# Altium PCB Main.PcbDoc (part 2 of 2)
Units mil, origin at the board's own origin, x right, y up, seen from the top; angles counter-clockwise.
Board outline 3887.19 x 3937.01 mil, 4 copper layers (Top Layer, GND, 3V3, Bottom Layer), stack 62.296 mil thick; 123 components, 108 nets, 442 pads, 608 vias.
Unrouted connection lines stored in the file: 51.
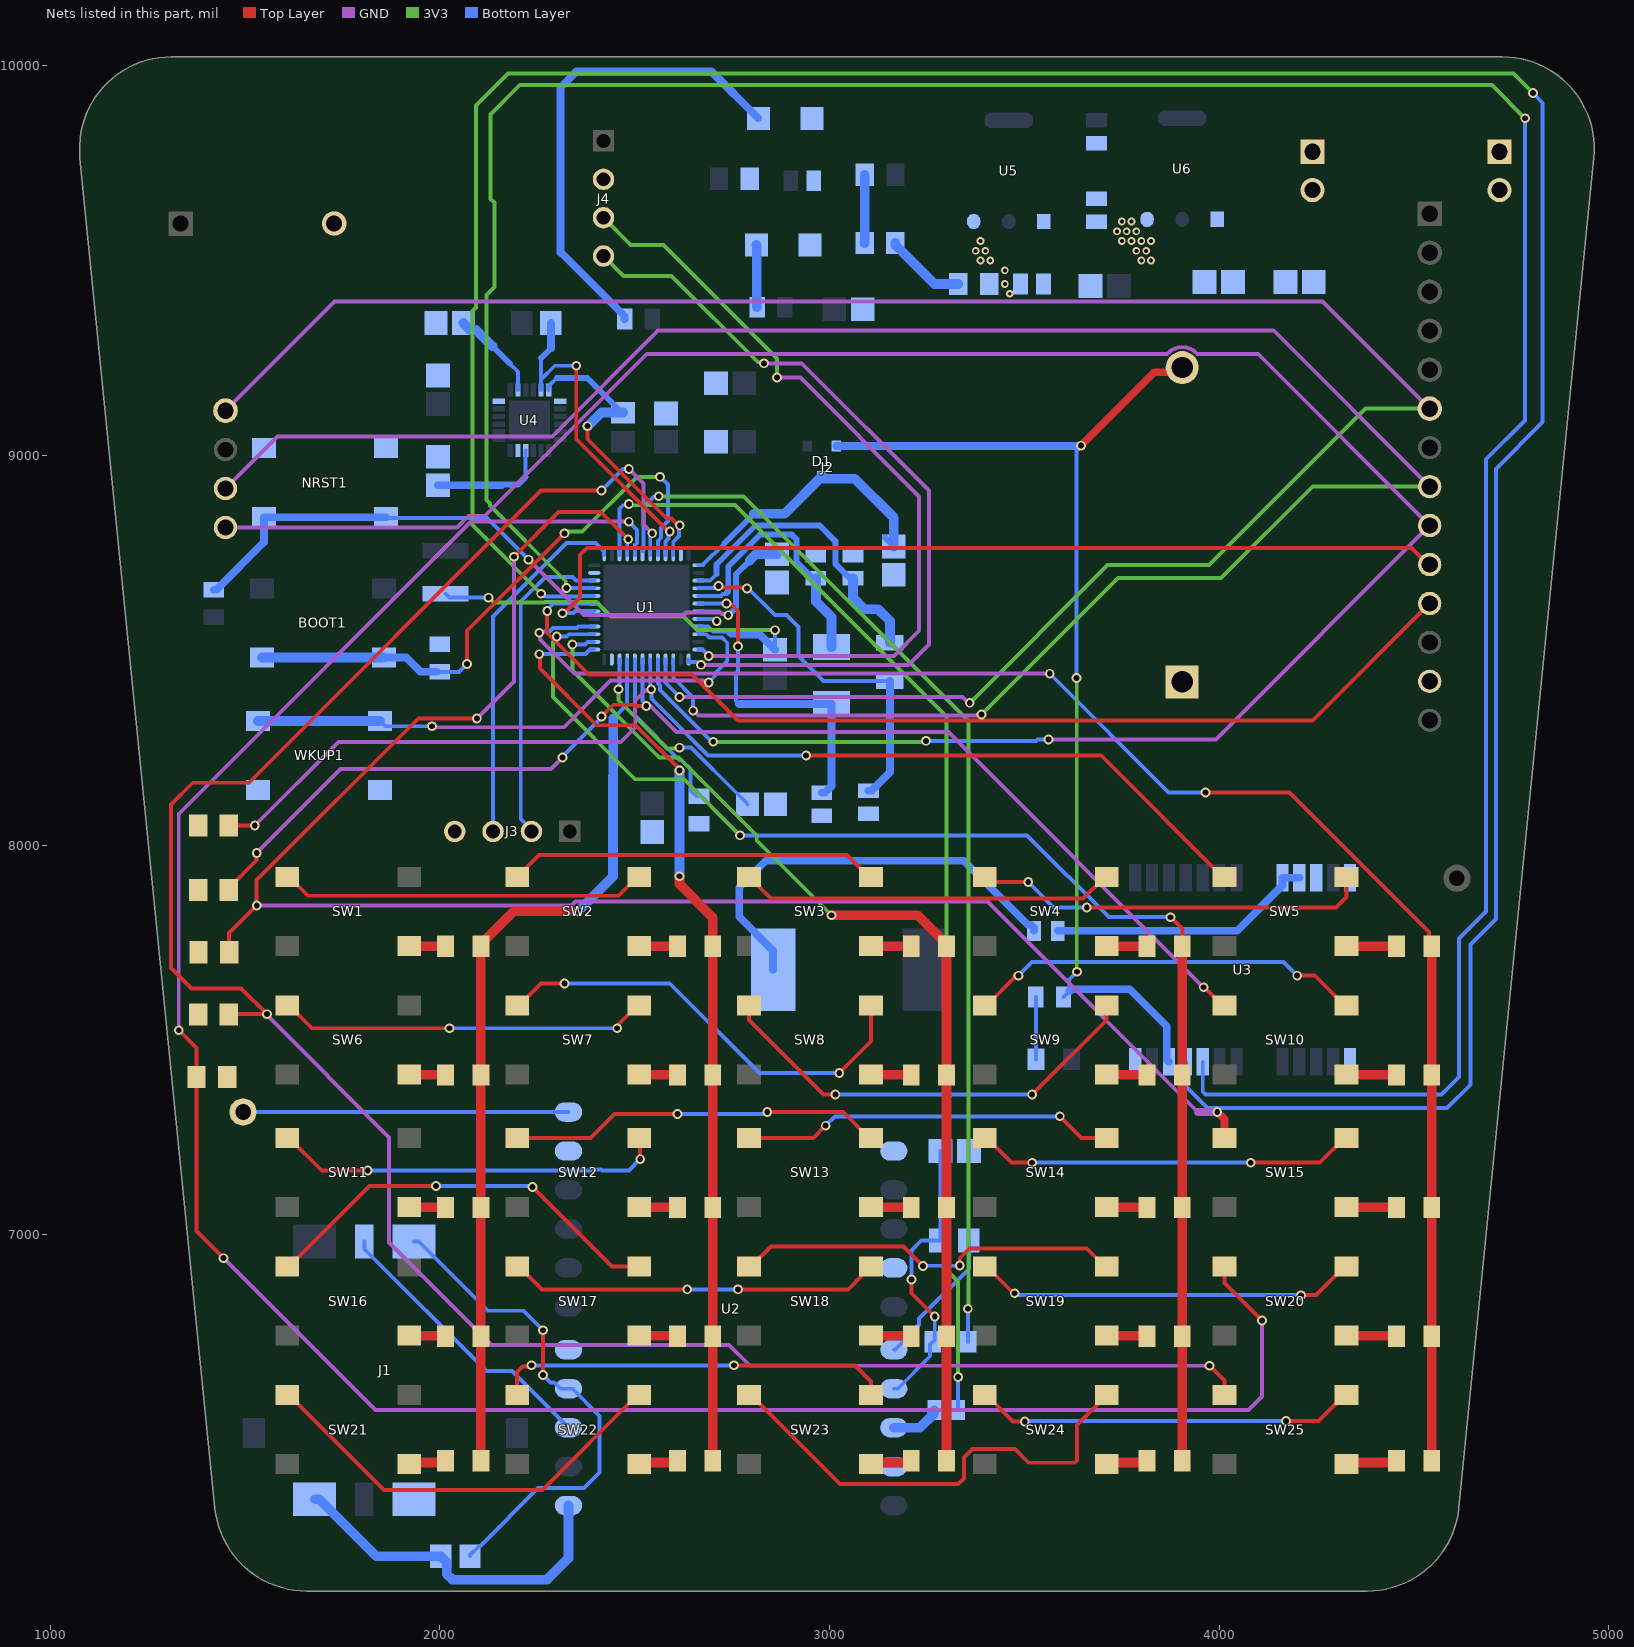
[diagram p4: the nets of this part, all layers, seen from the top]

## Via types
v1: diameter 19.68, hole 10.1, Top Layer to 3V3, 228 vias
v2: diameter 19.68, hole 10.1, 3V3 to Bottom Layer, 190 vias
v3: diameter 25, hole 15, Top Layer to Bottom Layer, 63 vias
v4: diameter 25, hole 15, GND to Bottom Layer, 29 vias
v5: diameter 19.68, hole 7.87, Top Layer to Bottom Layer, 29 vias
v6: diameter 25, hole 15, Top Layer to GND, 22 vias
v7: diameter 19.68, hole 10.1, Top Layer to Bottom Layer, 21 vias
v8: diameter 25, hole 15, 3V3 to Bottom Layer, 20 vias
v9: diameter 25, hole 15, GND to 3V3, 4 vias
v10: diameter 25, hole 15, Top Layer to 3V3, 2 vias

## Nets (pads, with @x,y where several pads share a name; then routed paths per layer and width w, separated by ;. In a path a pad name is that pad's centre, name@x,y a point inside that pad or via, vN(x,y) a via of type N, cw(c..) or ccw(c..) an arc to the next point about the centre after c; other vN are vias at no path point) (continued)
D/C: J2.11 U1.31 | length 2670.6
  Top Layer w10: v3(2275.6,8600.9) 2275,8600.29 2275,8545 2382.21,8437.79 2647.21,8437.79 2765,8320 4240,8320 J2.11@4540,8620
  Bottom Layer w10: v3(2275.6,8600.9) 2275.6,8604.95 2288.36,8617.71 2288.36,8619.84 U1.31@2396.14,8619.84
GND: BT1.1 C1.1 C2.2 C3.1 C4.1 C5.1 C6.1 C7.2 C8.2 C9.2 C10.2 C12.1 C13.1 C14.1 C15.1 C16.1 C17.1 C18.1 C19.2 C20.2 C21.1 C22.1 C23.2 C24.2 DS1.2 DS2.2 J1.C3 J2.13 J3.4 J4.2 LS1.2 NRST1.1 NRST1.2 P2.2 P4.2 R1.1 R2.1 R10.1 R11.1 R12.1 R13.1 R14.1 R19.1 U1.8 U1.23 U1.35 U1.47 U2.1 U2.4 U2.9 U2.15 U2.20 U3.10 U3.12 U3.13 U3.24 U4.1 U4.11 U4.18 U5.1 U6.1 WKUP1.3 WKUP1.4 | length 49.2
  Bottom Layer w10: U1.8@2663.86,8580.47 2700.76,8580.47 2706.58,8574.65 v4(2710.64,8574.65)
GPRS_RX: R4.1 U1.39 | length 2981.5
  3V3 w10: v3(2485,8875) 2487.87,8872.13 2511.85,8872.13 2512.22,8872.5 2757.5,8872.5 3300.28,8329.72 3300.28,6909.37 3330,6879.64 v3(3330,6635)
  Bottom Layer w10: U1.39@2461.1,8743.86 2461.1,8863.01 2470.23,8872.13 2482.13,8872.13 v3(2485,8875) ; R4.1@3330,6550 v3(3330,6635)
GPRS_TX: D2.1 U1.42 | length 2792.3
  3V3 w10: v3(2561.82,8895) 2780,8895 3356.59,8318.41 3356.59,6811.59 v3(3355,6810)
  Bottom Layer w10: U1.42@2520.24,8754.61 2522.5,8756.87 2522.5,8867.5 2548.04,8893.04 2559.86,8893.04 v3(2561.82,8895) ; v3(3355,6810) 3355.28,6809.72 D2.1@3355.28,6725
GPS_RX: U1.33 U3.20 | length 7390.7
  3V3 w10: v8(2325,8660) 2323.05,8661.95 2323.05,8676.95 2129.09,8870.91 2129.09,8876.82 2120.16,8885.75 2120.16,9412.1 2139.84,9431.78 2139.84,9648.47 2130,9658.31 2130,9875 2205,9950 4700,9950 v8(4785,9865)
  Bottom Layer w10: v8(2325,8660) 2325.71,8659.29 2396.06,8659.29 U1.33@2396.14,8659.21 ; U3.20@3957.64,7443.78 3957.64,7367.36 3965,7360 4570,7360 4615,7405 4615,7760 4685,7830 4685,8990 4785,9090 v8(4785,9865)
GPS_TX: U1.32 U3.21 | length 7710
  3V3 w10: v8(2260,8645) 2084.09,8820.91 2084.09,9370.68 2092.5,9379.09 2092.5,9897.5 2175,9980 4755,9980 v8(4805,9930)
  Bottom Layer w10: v8(2260,8645) 2264.06,8645 2271.56,8637.5 2364.32,8637.5 2366.35,8639.53 U1.32@2396.14,8639.53 ; U3.21@3914.33,7443.78 3914.33,7380.67 3970,7325 4585,7325 4645,7385 4645,7745 4709.9,7809.9 4709.9,8965.46 4830,9085.56 4830,9905 v8(4805,9930)
I/O: J1.C1 R5.1 U2.11 | length 912
  Bottom Layer w25: J1.C1@1678.9,6321.18 1690.71,6321.18 1836.89,6175 R5.1@2002.6,6175 2017.66,6159.94 2017.66,6129.64 2032.3,6115 2275,6115 2330,6170 U2.11@2330,6305
MISO: J2.6 U1.16 | length 5674.8
  GND w10: J2.6@1450,9115 1730,9395 4265,9395 J2.6@4540,9120 ; v4(2615,8380) 3340.94,8380 3355.94,8365 v9(3360,8365)
  3V3 w10: v9(3360,8365) 3713.56,8718.56 3973.56,8718.56 4375,9120 J2.6@4540,9120
  Bottom Layer w10: U1.16@2579.21,8476.14 2579.21,8416.48 2615,8380.69 v4(2615,8380)
MOSI: J2.9 U1.17 | length 5807
  GND w10: J2.9@1450,8815 2043.79,8815 2073.79,8845 2115.91,8845 2530.91,9260 3865.72,9260 3867.55,9261.84 cw(c3905,9225.43) 3942.45,9261.83 3944.28,9260 4100,9260 4102.93,9257.07 J2.9@4540,8820 3991.25,8271.25 v4(3562.19,8271.25)
  3V3 w10: v8(2701.48,8265) 3245,8265 v8(3247.5,8267.5)
  Bottom Layer w10: U1.17@2559.53,8476.14 2559.53,8414.95 2565.16,8409.32 2565.16,8398.02 2698.18,8265 v8(2701.48,8265) ; v8(3247.5,8267.5) 3529.69,8267.5 3533.44,8271.25 v4(3562.19,8271.25)
NetAnt1_1: Ant1.1 U2.21 | length 835
  Bottom Layer w10: Ant1.1@1495,7315 U2.21@2330,7315
NetBOOT1_3: BOOT1.3 BOOT1.4 R2.2 U1.44 | length 1513.8
  Top Layer w10: v6(2070,8465) 2070,8550 v10(2320,8800)
  3V3 w10: v10(2320,8800) 2325,8805 2365.47,8805 2505.47,8945 v8(2565,8945)
  Bottom Layer w10: R2.2@1993.11,8444.57 R2.2@2000,8444.57 2049.57,8444.57 v6(2070,8465) ; U1.44@2559.53,8743.86 2559.53,8780.72 2567.5,8788.69 2567.5,8814.32 2585,8831.82 2585,8925 v8(2565,8945)
  Bottom Layer w20: BOOT1.3@1856.5,8481.42 1913.58,8481.42 1950.43,8444.57 R2.2@1993.11,8444.57
  Bottom Layer w25: BOOT1.4@1543.5,8481.42 BOOT1.3@1856.5,8481.42
  other v4: 2070,8465
NetC1_2: C1.2 U1.3 Y1.1 | length 784.7
  Bottom Layer w10: U1.3@2663.86,8678.9 2693.9,8678.9 2710,8695
  Bottom Layer w15: 2710,8695 2710,8720 2810,8820 2975,8820 3015,8780 3015,8722.13 3052.13,8685 C1.2@3060,8685
  Bottom Layer w25: C1.2@3060,8685 3060,8635 3090,8605 3125,8605 3155,8575 Y1.1@3155,8519.21
NetC2_1: C2.1 U1.22 | length 550.4
  3V3 w10: v8(2458.29,8400) 2458.29,8371.71 2582.5,8247.5 2612.5,8247.5 v8(2615,8250)
  Bottom Layer w10: v8(2458.29,8400) 2461.03,8402.74 2461.03,8476.06 U1.22@2461.1,8476.14 ; v8(2615,8250) 2645,8250 2764.49,8130.51 2765.47,8130.51 2790,8105.98 C2.1@2790,8105
NetC3_2: C3.2 NRST1.3 NRST1.4 R21.2 U1.7 | length 1865.4
  GND w10: v4(2227.47,8732.53) 2369.84,8590.16 2624.84,8590.16 2631.83,8597.15 2719.96,8597.15 2724.24,8592.87 2737.13,8592.87 v4(2740,8590)
  Bottom Layer w10: NRST1.3@1861.5,8841.42 1863.82,8839.09 2120.91,8839.09 v4(2227.47,8732.53) ; U1.7@2663.86,8600.16 2716.95,8600.16 2724.24,8592.87 2737.13,8592.87 v4(2740,8590)
  Bottom Layer w15: v4(2740,8590) 2740.84,8590 2760.36,8609.52 2760.36,8631.52 2760,8631.88 2760,8695 2795,8730
  Bottom Layer w20: R21.2@1420,8655.43 1426.89,8655.43 1548.5,8777.05 NRST1.4@1548.5,8841.42 NRST1.3@1861.5,8841.42
  Bottom Layer w25: 2795,8730 2811.42,8746.42 C3.2@2865,8746.42
NetC4_2: C4.2 U1.4 Y1.2 | length 950.8
  Top Layer w10: v3(2715,8665) 2715,8662.03 2716.01,8661.01 2785.95,8661.01 v3(2788.48,8658.48)
  Bottom Layer w10: U1.4@2663.86,8659.21 2663.94,8659.29 2712.26,8659.29 2715,8662.03 v3(2715,8665) ; v3(2788.48,8658.48) 2791.52,8658.48 2860,8590 2890,8590 2920,8560 2920,8485 2984.21,8420.79 Y1.2@3155,8420.79
  Bottom Layer w20: C4.2@3100,8139.53 3107.87,8139.53 3155,8186.65 Y1.2@3155,8420.79
NetC5_2: C5.2 U1.5 Y2.1 | length 677.5
  Bottom Layer w10: U1.5@2663.86,8639.53 2721.89,8639.53 2726.95,8644.58 2733.41,8644.58 2735,8646.17
  Bottom Layer w15: 2735,8646.17 2740,8651.17 2740,8715 2821.61,8796.61 2903.39,8796.61 2915,8785 2915,8727.13 2957.13,8685 C5.2@2965,8685
  Bottom Layer w25: C5.2@2965,8685 2965,8625 3005,8585 Y2.1@3005,8507.83
NetC6_2: C6.2 U1.6 Y2.2 | length 832.4
  Top Layer w10: v6(2735.36,8619.87) 2738.23,8617 2748,8617 2765,8600 v6(2765,8510)
  Bottom Layer w10: U1.6@2663.86,8619.84 2701.26,8619.84 2701.42,8620 2735.23,8620 v6(2735.36,8619.87) ; v6(2765,8510) 2765,8444.97 2760,8439.97 2760,8370 2767.83,8362.17
  Bottom Layer w20: 2767.83,8362.17 Y2.2@3005,8362.17 3005,8151.65 2987.87,8134.53 C6.2@2980,8134.53
  other v4: 2765,8510 2735.36,8619.87
NetC12_2: C12.2 D2.2 R3.2 U2.7 | length 743
  Top Layer w10: v3(3210.05,6885.05) 3210.05,6849.95 v3(3270,6790)
  Bottom Layer w10: U2.7@3165,6605 3175,6605 3258.3,6688.3 3258.3,6718.57 3270,6730.28 v3(3270,6790) ; v3(3210.05,6885.05) 3210,6885 3210,6959.65 3235.35,6985 R3.2@3282.6,6985 3285,6987.4 C12.2@3285,7215
NetC13_2: C13.2 U4.20 | length 238.9
  Bottom Layer w10: 2180,9235 2200.47,9214.53 U4.20@2200.47,9167.76
  Bottom Layer w15: 2135,9280 2180,9235
  Bottom Layer w25: C13.2@2060.87,9340 2060.87,9339.02 2077.89,9321.99 2093.01,9321.99 2135,9280
NetC14_2: C14.2 U4.10 | length 301.3
  Bottom Layer w10: 2220.16,8945 U4.10@2220.16,9012.24
  Bottom Layer w15: 2158.58,8923.58 2160,8925 2200.16,8925 2220.16,8945
  Bottom Layer w20: C14.2@1995,8923.58 2158.58,8923.58
NetD3_1: D3.1 R6.2 | length 160.2
  Bottom Layer w10: R6.2@3529.57,7610 3529.57,7450.43 D3.1@3530,7450
NetD4_1: D4.1 D9.1 D14.1 D19.1 D24.1 U1.21 | length 2308.7
  Top Layer w25: D24.1@2105.28,6420 D19.1@2105.28,6740 D14.1@2105.28,7070 D9.1@2105.28,7410 D4.1@2105.28,7740 2105.28,7745.91 2189.37,7830 v3(2355,7830)
  Bottom Layer w10: 2445,8325 2480.79,8360.79 U1.21@2480.79,8476.14
  Bottom Layer w25: v3(2355,7830) 2444.09,7919.09 2444.09,8176.52 2445,8177.43 2445,8325
NetD4_2: D4.2 SW1.1 | length 93.8
  Top Layer w25: SW1.1@1921.5,7741.42 1922.2,7740.71 2014.02,7740.71 D4.2@2014.72,7740
NetD5_1: D5.1 D10.1 D15.1 D20.1 D25.1 U1.25 | length 2459
  Top Layer w10: v3(2255,8490) 2256.95,8488.05 2256.95,8453.05 2402.5,8307.5 2502.5,8307.5 2615,8195 v3(2615,8191.36)
  Top Layer w25: v3(2615,7920) 2615,7900 2700.28,7814.72 D5.1@2700.28,7740 D10.1@2700.28,7410 D15.1@2700.28,7070 D20.1@2700.28,6740 D25.1@2700.28,6420
  Bottom Layer w10: v3(2255,8490) 2373.74,8490 2385.47,8501.73 U1.25@2396.14,8501.73
  Bottom Layer w25: v3(2615,7920) v3(2615,8191.36)
NetD5_2: D5.2 SW2.1 | length 98.8
  Top Layer w25: SW2.1@2511.5,7741.42 2512.2,7740.71 2609.01,7740.71 D5.2@2609.72,7740
NetD6_1: D6.1 D11.1 D16.1 D21.1 D26.1 U1.26 | length 2710.9
  Top Layer w25: v10(3005,7820) 3226.18,7820 3300.28,7745.91 D6.1@3300.28,7740 D11.1@3300.28,7410 D16.1@3300.28,7070 3300.28,6930.63 3300,6930.36 3300,6909.64 3300.28,6909.37 D21.1@3300.28,6740 3300.28,6647.7 3300,6647.43 3300,6622.57 3300.28,6622.3 D26.1@3300.28,6420
  3V3 w10: v8(2340,8515) 2340,8448.18 2563.04,8225.14 2613.04,8225.14 2813.22,8024.96 2813.22,8011.78 v10(3005,7820)
  Bottom Layer w10: v8(2340,8515) 2372.5,8515 2378.84,8521.34 2396.06,8521.34 U1.26@2396.14,8521.42
NetD6_2: D6.2 SW3.1 | length 103.8
  Top Layer w25: SW3.1@3106.5,7741.42 3107.2,7740.71 3209.01,7740.71 D6.2@3209.72,7740
NetD7_1: D7.1 D12.1 D17.1 D22.1 D27.1 U1.27 | length 3484.4
  Top Layer w10: v6(3875,7815) 3905.28,7784.72 D7.1@3905.28,7740
  Top Layer w25: D27.1@3905.28,6420 D22.1@3905.28,6740 D17.1@3905.28,7070 D12.1@3905.28,7410 D7.1@3905.28,7740
  3V3 w10: v8(2300,8535) 2300,8531.64 2290,8521.64 2290,8380 2501.14,8168.86 2626.14,8168.86 v8(2770,8025)
  Bottom Layer w10: v8(2300,8535) 2325,8535 2331.1,8541.1 U1.27@2396.14,8541.1 ; v8(2770,8025) 3506.82,8025 3716.82,7815 v6(3875,7815)
  other v4: 3875,7815
NetD7_2: D7.2 SW4.1 | length 103.8
  Top Layer w25: SW4.1@3711.5,7741.42 3712.2,7740.71 3814.01,7740.71 D7.2@3814.72,7740
NetD8_1: D8.1 D13.1 D18.1 D23.1 D28.1 U1.28 | length 4117.8
  Top Layer w10: v6(3965,8135) 4180.32,8135 4538.62,7776.7 4538.62,7746.65 D8.1@4545.28,7740
  Top Layer w25: D28.1@4545.28,6420 D23.1@4545.28,6740 D18.1@4545.28,7070 D13.1@4545.28,7410 D8.1@4545.28,7740
  GND w10: v4(2255,8545) 2256.95,8543.05 2256.95,8528.05 2345,8440 v4(3565,8440)
  Bottom Layer w10: v4(2255,8545) 2257.87,8547.87 2281.05,8547.87 2290.68,8557.5 2351.92,8557.5 2355.21,8560.79 U1.28@2396.14,8560.79 ; v4(3565,8440) 3870,8135 v6(3965,8135)
  other v4: 3965,8135
NetD8_2: D8.2 SW5.1 | length 128.8
  Top Layer w25: SW5.1@4326.5,7741.42 4327.2,7740.71 4454.02,7740.71 D8.2@4454.72,7740
NetD9_2: D9.2 SW6.1 | length 93.8
  Top Layer w25: SW6.1@1921.5,7411.42 1922.2,7410.71 2014.02,7410.71 D9.2@2014.72,7410
NetD10_2: D10.2 SW7.1 | length 98.8
  Top Layer w25: SW7.1@2511.5,7411.42 2512.2,7410.71 2609.01,7410.71 D10.2@2609.72,7410
NetD11_2: D11.2 SW8.1 | length 103.8
  Top Layer w25: SW8.1@3106.5,7411.42 3107.2,7410.71 3209.01,7410.71 D11.2@3209.72,7410
NetD12_2: D12.2 SW9.1 | length 103.8
  Top Layer w25: SW9.1@3711.5,7411.42 3712.2,7410.71 3814.01,7410.71 D12.2@3814.72,7410
NetD13_2: D13.2 SW10.1 | length 128.8
  Top Layer w25: SW10.1@4326.5,7411.42 4327.2,7410.71 4454.02,7410.71 D13.2@4454.72,7410
NetD14_2: D14.2 SW11.1 | length 93.8
  Top Layer w25: SW11.1@1921.5,7071.42 1922.2,7070.71 2014.02,7070.71 D14.2@2014.72,7070
NetD15_2: D15.2 SW12.1 | length 98.8
  Top Layer w25: SW12.1@2511.5,7071.42 2512.2,7070.71 2609.01,7070.71 D15.2@2609.72,7070
NetD16_2: D16.2 SW13.1 | length 103.8
  Top Layer w25: SW13.1@3106.5,7071.42 3107.2,7070.71 3209.01,7070.71 D16.2@3209.72,7070
NetD17_2: D17.2 SW14.1 | length 103.8
  Top Layer w25: SW14.1@3711.5,7071.42 3712.2,7070.71 3814.01,7070.71 D17.2@3814.72,7070
NetD18_2: D18.2 SW15.1 | length 128.8
  Top Layer w25: SW15.1@4326.5,7071.42 4327.2,7070.71 4454.02,7070.71 D18.2@4454.72,7070
NetD19_2: D19.2 SW16.1 | length 93.8
  Top Layer w25: SW16.1@1921.5,6741.42 1922.2,6740.71 2014.02,6740.71 D19.2@2014.72,6740
NetD20_2: D20.2 SW17.1 | length 98.8
  Top Layer w25: SW17.1@2511.5,6741.42 2512.2,6740.71 2609.01,6740.71 D20.2@2609.72,6740
NetD21_2: D21.2 SW18.1 | length 103.8
  Top Layer w25: SW18.1@3106.5,6741.42 3107.2,6740.71 3209.01,6740.71 D21.2@3209.72,6740
NetD22_2: D22.2 SW19.1 | length 103.8
  Top Layer w25: SW19.1@3711.5,6741.42 3712.2,6740.71 3814.01,6740.71 D22.2@3814.72,6740
NetD23_2: D23.2 SW20.1 | length 128.8
  Top Layer w25: SW20.1@4326.5,6741.42 4327.2,6740.71 4454.02,6740.71 D23.2@4454.72,6740
NetD24_2: D24.2 SW21.1 | length 96.8
  Top Layer w25: SW21.1@1921.5,6411.42 1925.79,6415.71 2010.43,6415.71 D24.2@2014.72,6420
NetD25_2: D25.2 SW22.1 | length 101.8
  Top Layer w25: SW22.1@2511.5,6411.42 2515.79,6415.71 2605.43,6415.71 D25.2@2609.72,6420
NetD26_2: D26.2 SW23.1 | length 106.8
  Top Layer w25: SW23.1@3106.5,6411.42 3110.79,6415.71 3205.43,6415.71 D26.2@3209.72,6420
NetD27_2: D27.2 SW24.1 | length 106.8
  Top Layer w25: SW24.1@3711.5,6411.42 3715.79,6415.71 3810.43,6415.71 D27.2@3814.72,6420
NetD28_2: D28.2 SW25.1 | length 131.8
  Top Layer w25: SW25.1@4326.5,6411.42 4330.79,6415.71 4450.43,6415.71 D28.2@4454.72,6420
NetDS1_1: DS1.1 R15.2 | length 1236.5
  Bottom Layer w20: R15.2@2474.13,9350 2474.13,9356.89 2310,9521.02 2310,9945 2350,9985 2697.2,9985 DS1.1@2817.2,9865
NetDS2_1: DS2.1 R20.2 | length 160.8
  Bottom Layer w25: DS2.1@2812.2,9540 2813.17,9539.03 2813.17,9380.97 R20.2@2814.13,9380
NetJ3_2: J3.2 U1.34 | length 819.1
  Bottom Layer w10: J3.2@2235,8035 2235,8040.19 2207.5,8067.69 2207.5,8624.32 2270.68,8687.5 2340.68,8687.5 2349.28,8678.9 U1.34@2396.14,8678.9
NetJ3_3: J3.3 U1.37 | length 933
  Bottom Layer w10: J3.3@2136.57,8035 2136.57,8586.57 2325,8775 2399.73,8775 2421.73,8753 U1.37@2421.73,8743.86
NetL2_1: L2.1 R7.2 | length 1111.5
  Bottom Layer w20: L2.1@2855.12,7680 2855.12,7729.21 2768.28,7816.05 2768.28,7891.94 2836.35,7960 3344.45,7960 3508.66,7795.78 3516.61,7795.78 3524.45,7787.95 R7.2@3524.45,7780
NetR1_2: R1.2 U1.20 | length 425.8
  Bottom Layer w10: U1.20@2500.47,8476.14 2500.47,8332.71 2615.46,8217.72 2620.46,8217.72 2643.43,8194.75 2643.43,8140.12 2658.11,8125.43 R1.2@2665,8125.43
NetR3_1: R3.1 U2.6 | length 361.6
  Bottom Layer w10: U2.6@3165,6705 3168.24,6705 3187.5,6724.26 3187.5,6727.5 3230,6770 3230,6785 3357.4,6912.4 R3.1@3357.4,6985
NetR4_2: R4.2 U2.8 | length 127.2
  Bottom Layer w25: U2.8@3165,6505 3231.84,6505 3268.89,6542.05 R4.2@3268.89,6550
NetR7_1: R7.1 U3.8 U3.9 | length 688.1
  Bottom Layer w20: R7.1@3585.55,7780 4045.83,7780 4162.36,7896.53 U3.8@4162.36,7916.22 U3.9@4205.67,7916.22
NetR8_2: R8.2 U1.45 U4.23 | length 879.8
  Top Layer w10: v3(2350,9230) 2350,9041.82 2586.82,8805 v3(2590,8805)
  Bottom Layer w10: U4.23@2259.53,9167.76 2259.53,9194.53 ; 2259.53,9249.53 2259.53,9194.53 ; v3(2350,9230) 2295,9230 2259.53,9194.53 ; U1.45@2579.21,8743.86 2579.21,8779.19 2587.13,8787.11 2587.13,8802.13 v3(2590,8805)
  Bottom Layer w15: 2259.53,9249.53 2285,9275
  Bottom Layer w20: 2285,9275 R8.2@2285,9340
NetR9_2: R9.2 U1.46 U4.24 | length 794.7
  Top Layer w10: v3(2378.52,9075) 2378.52,9041.48 2582.16,8837.84 2594.26,8837.84 2611.67,8820.43 v3(2615.72,8820.43)
  Bottom Layer w10: U4.24@2279.21,9167.76 2279.21,9177.6 2300,9198.39 ; U1.46@2598.9,8743.86 2598.9,8777.66 2614.17,8792.93 2614.17,8818.88 v3(2615.72,8820.43)
  Bottom Layer w15: 2300,9198.39 2378.46,9198.39 R9.2@2467.05,9109.8
  Bottom Layer w25: v3(2378.52,9075) 2380,9075 2414.8,9109.8 2467.05,9109.8 R9.2@2470,9109.8
NetR16_1: R16.1 R17.2 | length 208.3
  Bottom Layer w25: R17.2@3168.74,9545 3168.74,9540.08 3268.82,9440 R16.1@3330.63,9440
NetR17_1: R17.1 R18.2 | length 175.3
  Bottom Layer w25: R17.1@3090,9545 3090.32,9545.32 3090.32,9719.68 R18.2@3090.63,9720
NetSW1_4: SW1.4 SW2.3 | length 948.2
  Top Layer w10: SW1.4@1608.5,7918.58 1613.43,7918.58 1662.01,7870 2457.99,7870 2506.57,7918.58 SW2.3@2511.5,7918.58 SW2.3@2516.42,7918.58
NetSW2_4: SW2.4 SW3.3 | length 954.7
  Top Layer w10: SW2.4@2198.5,7918.58 2254.92,7975 3045.16,7975 3101.57,7918.58 SW3.3@3106.5,7918.58
NetSW3_4: SW3.4 SW4.3 | length 967.3
  Top Layer w10: SW3.4@2793.5,7918.58 2798.43,7918.58 2819.02,7897.99 2819.02,7893.07 2849.59,7862.5 3650.49,7862.5 3706.57,7918.58 SW4.3@3711.5,7918.58
NetSW4_4: SW4.4 SW5.3 | length 1023.6
  Top Layer w10: SW4.4@3398.5,7918.58 3412.09,7905 v4(3510,7905) ; v4(3660,7840) 4300,7840 4326.5,7866.5 SW5.3@4326.5,7918.58
  Bottom Layer w10: v4(3510,7905) 3575,7840 v4(3660,7840)
  other v6: 3660,7840 3510,7905
NetSW6_4: SW6.4 SW7.3 | length 955.6
  Top Layer w10: SW6.4@1608.5,7588.58 1613.43,7588.58 1672.01,7530 v3(2025,7530) ; v3(2455,7530) 2457.87,7532.87 2457.87,7539.88 2506.57,7588.58 SW7.3@2511.5,7588.58
  Bottom Layer w10: v3(2025,7530) v3(2455,7530)
NetSW7_4: SW7.4 SW8.3 | length 1152.5
  Top Layer w10: SW7.4@2198.5,7588.58 2203.43,7588.58 2259.84,7645 v3(2320,7645) ; v3(3025,7415) 3106.5,7496.5 SW8.3@3106.5,7588.58
  Bottom Layer w10: v3(2320,7645) 2590,7645 2820,7415 v3(3025,7415)
NetSW8_4: SW8.4 SW9.3 | length 1155.7
  Top Layer w10: SW8.4@2798.43,7588.58 SW8.4@2793.5,7588.58 2793.5,7551.5 2985,7360 v3(3015,7360) ; v3(3520,7360) 3711.5,7551.5 SW9.3@3711.5,7588.58
  Bottom Layer w10: v3(3015,7360) v3(3520,7360)
NetSW9_4: SW9.4 SW10.3 | length 1020.3
  Top Layer w10: SW9.4@3403.43,7588.58 v3@3478.89,7664.04 ; v3(4200,7665) 4245.16,7665 4321.57,7588.58 SW10.3@4326.5,7588.58
  Top Layer w20: SW9.4@3398.5,7588.58 SW9.4@3403.43,7588.58 ; v3@3478.89,7664.04 3484.04,7664.04 v3(3485,7665)
  Bottom Layer w10: v3(3485,7665) 3520,7700 4165,7700 v3(4200,7665)
NetSW11_4: SW11.4 SW12.3 | length 1009.9
  Top Layer w10: SW11.4@1608.5,7248.58 1613.43,7248.58 1697.01,7165 v3(1815,7165) ; SW12.3@2511.5,7248.58 2514.14,7245.94 v3(2514.14,7194.14)
  Bottom Layer w10: v3(1815,7165) 2393.18,7165 2395.68,7167.5 2414.32,7167.5 2416.82,7165 2485,7165 v3(2514.14,7194.14)
NetSW12_4: SW12.4 SW13.3 | length 963
  Top Layer w10: SW12.4@2198.5,7248.58 2386.3,7248.58 2447.72,7310 v3(2610,7310) ; v3(2840,7315) 3035.16,7315 3101.57,7248.58 SW13.3@3106.5,7248.58
  Bottom Layer w10: v3(2610,7310) 2835,7310 v3(2840,7315)
NetSW13_4: SW13.4 SW14.3 | length 963.9
  Top Layer w10: SW13.4@2793.5,7248.58 2958.58,7248.58 v3(2990,7280) ; v3(3590.98,7304.02) 3646.42,7248.58 SW14.3@3711.5,7248.58
  Bottom Layer w10: v3(2990,7280) 3014.02,7304.02 v3(3590.98,7304.02)
NetSW14_4: SW14.4 SW15.3 | length 980.7
  Top Layer w10: SW14.4@3398.5,7248.58 3403.43,7248.58 3467.01,7185 v3(3520,7185) ; v3(4080.8,7185) 4257.99,7185 4321.57,7248.58 SW15.3@4326.5,7248.58
  Bottom Layer w10: v3(3520,7185) v3(4080.8,7185)
NetSW16_4: SW16.4 SW17.3 | length 1078.2
  Top Layer w10: SW16.4@1608.5,6918.58 1613.43,6918.58 1819.84,7125 v3(1990,7125) ; v3(2237.9,7122.9) 2442.22,6918.58 SW17.3@2511.5,6918.58
  Bottom Layer w10: v3(1990,7125) 2240,7125 v3(2237.9,7122.9)
NetSW17_4: SW17.4 SW18.3 | length 959.4
  Top Layer w10: SW17.4@2198.5,6918.58 2203.43,6918.58 2262.01,6860 v3(2635,6860) ; v3(2765,6860) 3047.91,6860 3080.98,6893.07 3080.98,6897.99 3101.57,6918.58 SW18.3@3106.5,6918.58
  Bottom Layer w10: v3(2635,6860) v3(2765,6860)
NetSW18_4: SW18.4 SW19.3 | length 1008.9
  Top Layer w10: SW18.4@2793.5,6918.58 2798.43,6918.58 2849.84,6970 3190,6970 v3(3240,6920) ; v3(3334.09,6920.91) 3334.11,6939.78 3353.48,6959.14 3359.34,6965 3660.16,6965 3706.57,6918.58 SW19.3@3711.5,6918.58
  Bottom Layer w10: v3(3240,6920) 3240.45,6920.45 3333.64,6920.45 v3(3334.09,6920.91)
NetSW19_4: SW19.4 SW20.3 | length 988.9
  Top Layer w10: SW19.4@3398.5,6918.58 3403.43,6918.58 3472.01,6850 v3(3475,6850) ; v3(4210,6845) 4247.99,6845 4321.57,6918.58 SW20.3@4326.5,6918.58
  Bottom Layer w10: v3(3475,6850) 3480,6845 v3(4210,6845)
NetSW21_4: SW21.4 SW22.3 | length 1104.8
  Top Layer w10: SW21.4@1608.5,6588.58 1613.43,6588.58 1857.01,6345 2262.99,6345 2506.57,6588.58 SW22.3@2511.5,6588.58
NetSW22_4: SW22.4 SW23.3 | length 1026.6
  Top Layer w10: SW22.4@2198.5,6588.58 2198.5,6648.08 2212.55,6662.13 2232.13,6662.13 v3(2235,6665) ; v3(2755,6665) 3065,6665 3106.5,6623.5 SW23.3@3106.5,6588.58
  Bottom Layer w10: v3(2235,6665) v3(2755,6665)
NetSW23_4: SW23.4 SW24.3 | length 1223.8
  Top Layer w10: SW23.4@2793.5,6588.58 2798.43,6588.58 3027.01,6360 3330,6360 3344.96,6374.96 3344.96,6421.05 3345.52,6421.61 3345.52,6428.68 3357.99,6441.15 3366.84,6450 3476.04,6450 3511.04,6415 3629.14,6415 3635,6420.86 3635,6512.09 3685.98,6563.07 3685.98,6567.99 3706.57,6588.58 SW24.3@3711.5,6588.58
NetSW24_4: SW24.4 SW25.3 | length 984.2
  Top Layer w10: SW24.4@3398.5,6588.58 3403.43,6588.58 3471.23,6520.78 v3(3500.78,6520.78) ; v3(4171.25,6522.01) 4255,6522.01 4321.57,6588.58 SW25.3@4326.5,6588.58
  Bottom Layer w10: v3(3500.78,6520.78) 3502.01,6522.01 v3(4171.25,6522.01)
NetU1_10: U1.10 WKUP1.1 WKUP1.2 | length 1419.1
  GND w10: v4(1980,8305) 1982.5,8302.5 2318.13,8302.5 2438.13,8422.5 2676.64,8422.5 2678.77,8420.37 2687.13,8420.37 v4(2690,8417.5)
  Bottom Layer w10: WKUP1.1@1846.5,8318.58 1860.08,8305 v4(1980,8305) ; U1.10@2663.86,8541.1 2683.75,8541.1 2691.65,8533.2 2704.56,8533.2 2705.25,8532.5 2724.32,8532.5 2737.5,8519.32 2737.5,8472.5 2709.23,8444.23 2709.23,8437.16 2690,8417.93 v4(2690,8417.5)
  Bottom Layer w25: WKUP1.2@1533.5,8318.58 WKUP1.1@1846.5,8318.58
Printer_RX: J4.4 U1.13 | length 2126.8
  GND w10: v4(2670,8462.5) 3202.5,8462.5 3255,8515 3255,8910 2928.82,9236.18 v9(2831.61,9236.18)
  3V3 w10: J4.4@2420,9511.57 2471.42,9460.16 2594.84,9460.16 2815.95,9239.05 2828.74,9239.05 v9(2831.61,9236.18)
  Bottom Layer w10: U1.13@2638.27,8476.14 2638.27,8470.17 2638.35,8470.09 2658.35,8470.09 2665.94,8462.5 v4(2670,8462.5)
Printer_TX: J4.3 U1.12 | length 2080.5
  GND w10: v4(2690,8485) 3165,8485 3230,8550 3230,8895 2925,9200 v9(2865,9200)
  3V3 w10: J4.3@2420,9610 2489.84,9540.16 2573.68,9540.16 2865,9248.84 v9(2865,9200)
  Bottom Layer w10: U1.12@2663.86,8501.73 2674.53,8501.73 2690,8486.26 v4(2690,8485)
RESET: J2.10 U1.30 | length 2459.4
  Top Layer w10: v3(2315,8595) 2319.06,8595 2332.79,8608.74 2333.08,8608.74 2360,8635.65 2360,8745 2377.5,8762.5 4493.86,8762.5 4536.36,8720 J2.10@4540,8720
  Bottom Layer w10: v3(2315,8595) 2315.23,8595.23 2342.5,8595.23 2347.5,8600.23 U1.30@2396.14,8600.16 U1.30@2396.14,8600.16
ROW1: R10.2 SW5.4 U1.18 | length 3032.6
  Top Layer w10: R10.2@1458.74,8050 v3(1525,8050) ; v6(2940,8230) 3697.16,8230 4008.58,7918.58 SW5.4@4013.5,7918.58
  GND w10: v3(1525,8050) 1739.51,8264.5 2464.3,8264.5 2501.34,8301.55 2501.34,8371.34 2527.13,8397.13 2539.79,8397.13 v3(2542.66,8400)
  Bottom Layer w10: U1.18@2539.84,8476.14 2539.84,8437.5 2540,8437.34 2540,8402.66 v3(2542.66,8400) ; v3@2542.66,8400.94 2542.66,8375.52 2688.18,8230 v6(2940,8230)
  other v4: 2940,8230
ROW2: R11.2 SW10.4 U1.19 | length 3212.6
  Top Layer w10: R11.2@1458.74,7885 1458.74,7889.92 1530,7961.18 v6(1530,7980) ; v4(2415,8330) 2445,8360 2497.25,8360 2500.64,8356.61 v6(2529.75,8356.61) ; v6(3960,7635) 3962.16,7635 4008.58,7588.58 SW10.4@4013.5,7588.58
  GND w10: v6(1530,7980) 1745,8195 2285,8195 v4(2315,8225) ; v6(2529.75,8356.61) 2531.18,8358.04 2539.46,8358.04 2607.5,8290 3305,8290 v6(3960,7635)
  Bottom Layer w10: v4(2315,8225) 2315,8227.5 2415,8327.5 v4(2415,8330) ; U1.19@2520.16,8476.14 2520.16,8370.26 2529.75,8360.67 v6(2529.75,8356.61)
  other v4: 2529.75,8356.61
  other v6: 2415,8330
ROW3: R12.2 SW15.4 U1.40 | length 4585.1
  Top Layer w10: R12.2@1459.37,7725 1459.37,7774.37 v6(1530,7845) 1530,7910.32 1944.68,8325 v6(2095,8325) ; v6(2190,8740) 2305,8855 2412.93,8855 2482.93,8785 v6(2483.6,8785)
  Top Layer w20: v6(3995,7315) 4013.5,7296.5 SW15.4@4013.5,7248.58
  GND w10: v6(1530,7845) 2338.18,7845 2348.18,7855 3405,7855 3945,7315 ; v6(2095,8325) 2190,8420 v6(2190,8740)
  GND w20: 3945,7315 v6(3995,7315)
  Bottom Layer w10: U1.40@2480.79,8743.86 2480.87,8743.94 2480.87,8782.26 v6(2483.6,8785)
  other v4: 2483.6,8785
ROW4: R13.2 SW20.4 U1.41 | length 5965.1
  Top Layer w10: v3(1330,7525) 1375.63,7479.37 R13.2@1375.63,7405 1375.63,7009.37 v3(1445,6940) ; SW20.4@4013.5,6918.58 4013.5,6876.5 v3(4110,6780)
  GND w10: v3(1330,7525) 1330,8080 2080,8830 v3(2485,8830) ; v3(1445,6940) 1835,6550 4075,6550 4110,6585 v3(4110,6780)
  Bottom Layer w10: v3(2485,8830) 2506.1,8808.9 2506.1,8775.68 2500.47,8770.05 U1.41@2500.47,8743.86
ROW5: R14.2 SW25.4 U1.43 | length 5638.7
  Top Layer w10: R14.2@1458.74,7565 1459.91,7566.17 v3(1556.17,7566.17) 1490,7632.35 1362.65,7632.35 1310,7685 1310,8104.14 1365.86,8160 1510,8160 2260,8910 v4(2415,8910) ; v3(3975,6663.91) 3975,6665 4013.5,6626.5 SW25.4@4013.5,6588.58
  GND w10: v3(1556.17,7566.17) 1555,7565 1870,7250 1870,6980 2132.5,6717.5 2742.5,6717.5 2796.09,6663.91 v3(3975,6663.91) ; v4(2485,8965) 2522.5,8927.5 2522.5,8822.5 v4(2545,8800)
  Bottom Layer w10: v4(2415,8910) 2470,8965 v4(2485,8965) ; U1.43@2539.84,8743.86 2539.84,8790.78 2545,8795.94 v4(2545,8800)
  other v6: 2415,8910
RST: J1.C6 U2.13 | length 732.9
  Bottom Layer w10: J1.C6@1806.46,6982.6 1806.46,6962.91 2119.37,6650 2185,6650 U2.13@2330,6505
SCK: J2.8 U1.15 | length 5714.3
  GND w10: J2.8@1450,8915 1583.51,9048.51 2288.51,9048.51 2560,9320 4140,9320 J2.8@4540,8920 ; v4(2650,8345) 2650.86,8345 2663.36,8332.5 3387.5,8332.5 v9(3390,8335)
  3V3 w10: v9(3390,8335) 3740,8685 4005,8685 4240,8920 J2.8@4540,8920
  Bottom Layer w10: U1.15@2598.9,8476.14 2598.9,8429.89 2650,8378.79 v4(2650,8345)
VB: BT1.2 D1.2 R6.1 U3.22 | length 2789.6
  Top Layer w20: v3(3645,9025) 3833.1,9213.1 3892.67,9213.1 BT1.2@3905,9225.43
  3V3 w10: v8(3633.91,8428.91) 3634.45,8428.36 3634.45,7675.55 v8(3635,7675)
  Bottom Layer w10: R6.1@3600.43,7610 3615.12,7624.69 3615.12,7626.57 3615.12,7655.12 v8(3635,7675) ; v8(3633.91,8428.91) 3633.91,9011.64 3645,9022.73 v3(3645,9025)
  Bottom Layer w20: D1.2@3017.4,9024.37 3644.37,9024.37 v3(3645,9025) ; R6.1@3615.12,7626.57 3618.41,7626.57 3621.83,7630 3770,7630 3865.28,7534.72 3865.28,7449.53 U3.22@3871.02,7443.78
VBAT: C7.1 D1.3 U1.1 | length 745.3
  Bottom Layer w10: U1.1@2663.86,8718.27 2674.53,8718.27 2730,8773.74
  Bottom Layer w15: 2730,8773.74 2806.26,8850 ; C7.1@3141.99,8789.43 C7.1@3165,8766.42
  Bottom Layer w25: 2806.26,8850 2884.37,8850 2978.72,8944.35 2979.31,8944.35 D1.3@2980,8945.04 ; D1.3@2980,8945.63 D1.3@2980,8945.04 ; C7.1@3165,8766.42 3165,8840 3065,8940 2985.63,8940 2981.28,8944.35 2980.69,8944.35 D1.3@2980,8945.04
VCC: C17.2 C19.1 C21.2 C23.1 P2.1 P4.1 R16.2 U5.3 U6.3 | length 15.3
  Bottom Layer w40: P2.1@4239.33,9779.21 P2.1@4244.72,9773.82 ; P4.1@4719.61,9773.82 P4.1@4725,9768.43
  other v7: 3462.5,9414.84 3450,9439.84 3450,9475 3387.5,9500 3412.5,9500 3800,9500 3825,9500 3375,9525 3400,9525 3787.5,9525 3812.5,9525 3387.5,9550 3750,9550 3775,9550 3800,9550 3825,9550 3737.5,9575 3762.5,9575 3787.5,9575 3750,9600 3775,9600
VREF: C11.2 L1.1 U1.9 | length 1156.8
  3V3 w10: v8(2125,8635) 2125.86,8635 2138.36,8622.5 2269.32,8622.5 2270.22,8623.4 2401.93,8623.4 2438.79,8586.53 2624.84,8586.53 2659.76,8551.61 v8(2860,8551.61)
  Bottom Layer w10: L1.1@2015,8645 2025,8635 v8(2125,8635) ; U1.9@2663.86,8560.79 2663.94,8560.71 2688.89,8560.71 2701.4,8548.2 2713,8548.2 2714.81,8550 ; C11.2@2860,8501.42 v8(2860,8551.61)
  Bottom Layer w15: 2714.81,8550 2737.4,8550 2747.4,8540 2770,8540
  Bottom Layer w20: 2770,8540 2821.42,8540 C11.2@2860,8501.42
VSIM: J1.C7 R5.2 U2.14 | length 1297.1
  Top Layer w10: v3(2265,6640) v3(2265,6755)
  Bottom Layer w10: J1.C7@1934.02,6982.6 1945.83,6982.6 2123.43,6805 2215,6805 v3(2265,6755) ; R5.2@2077.4,6175 2077.4,6177.95 2099.96,6200.51 2102.91,6200.51 2252.4,6350 2370,6350 2410,6390 2410,6535 2340,6605 U2.14@2330,6605 2309.18,6605 2293.62,6620.55 2284.45,6620.55 v3(2265,6640)
pads on no net: J1.1 J1.2 J1.C2 J2.1 J2.2 J2.3 J2.4 J2.5 SW1.2 SW1.3 SW2.2 SW3.2 SW4.2 SW5.2 SW6.2 SW6.3 SW7.2 SW8.2 SW9.2 SW10.2 SW11.2 SW11.3 SW12.2 SW13.2 SW14.2 SW15.2 SW16.2 SW16.3 SW17.2 SW18.2 SW19.2 SW20.2 SW21.2 SW21.3 SW22.2 SW23.2 SW24.2 SW25.2 U1.2 U1.49 U2.5 U2.10 U2.16 U2.17 U2.18 U3.1 U3.2 U3.3 U3.4 U3.5 U3.6 U3.7 U3.14 U3.15 U3.16 U3.17 U3.18 U3.19 U4.2 U4.3 U4.4 U4.5 U4.6 U4.7 U4.9 U4.12 U4.14 U4.15 U4.16 U4.17 U4.19 U4.21 U4.22 U4.25
copper on no net:
  other v5: 2443.39,8523.39 2486.69,8523.39 2530,8523.39 2573.31,8523.39 2616.62,8523.39 2443.39,8566.69 2486.69,8566.69 2530,8566.69 2573.31,8566.69 2616.62,8566.69 2443.39,8610 2486.69,8610 2530,8610 2573.31,8610 2616.62,8610 2443.39,8653.31 2486.69,8653.31 2530,8653.31 2573.31,8653.31 2616.62,8653.31 2443.39,8696.61 2486.69,8696.61 2530,8696.61 2573.31,8696.61 2616.62,8696.61 2208.35,9068.35 2251.65,9068.35 2208.35,9111.65 2251.65,9111.65

## Polygon pours and split planes (outlines as drawn)
GND on Bottom Layer "Top" (solid, remove dead copper, pour order 21): 1584.21,6097.59 1530,6125 1480,6175 1446.85,6215.93 1425.68,6300 1422.63,6300.76 1072.68,9800.27 1098.31,9888.42 1200.26,9995 1253.58,10015.61 1295.22,10022.81 4782.19,10022.81 4912.57,9932.01 4964.11,9789.59 4616.54,6313.85 4607.32,6257.94 4564.44,6174.44 4518.28,6128.28 4444.04,6094.66 4422.72,6085 4377.7,6080.42 2015,6085 1639.95,6085.73
3V3 on Bottom Layer "Top" (solid, pour order 20): 2755,9215 2745,9205 2745,8983.82 2943.82,8983.82 2955,8995 2955,9075 2815,9215 2813.54,9213.54 2745,9213.54
VCC on Bottom Layer "Top" (solid, pour order 5): 4330,9730 4335,9735 4760,9735 4760,9835 4750,9845 4745,9840 4190,9840 4145,9795 4145,9600 4130,9600 4085,9555 4012.5,9555 3947.5,9490 3915,9490 3860,9545 3860,9615 3845.47,9629.53 3651.54,9629.53 3640,9617.99 3640,9570 3655,9555 3726.06,9555 3876.06,9405 3990,9405 3990,9484.85 4075,9484.85 4085,9480 4085,9440 4140,9385 4190,9385 4200,9395 4200,9720 4210,9730
3V3 on Bottom Layer "Top" (solid, pour order 15): 3605,7490 3590,7475 3590,7360 3625,7325 3625,7320 3810,7320 3840,7350 3840,7474.8 3830,7484.8 3830,7485 3815,7485 3810,7480 3805,7480 3805,7390 3792.52,7377.52 3672.48,7377.52 3650,7400 3650,7475 3635,7490
3V3 on Bottom Layer "Top" (solid, pour order 8): 1505,9095 1515,9115 1550,9115 1590,9115 1895,9115 1905,9125 1905,9230 1380,9230 1355,9205 1355,9185 1355,8550 1380,8525 1465,8525 1515,8575 1890,8575 1930,8615 1930,8680 1965,8715 2085,8715 2105,8735 2105,8800 2080,8825 1940,8825 1840,8725 1550,8725 1505,8770
3V3 on Bottom Layer "Top" (solid, pour order 11): 2377.5,9957.5 2360,9940 2360,9775 2385,9750 2465,9750 2509.57,9705.43 2509.57,9311.52 2526.08,9295 2580,9295 2600,9315 2600,9960 2380,9960
5V on Bottom Layer "Top" (solid, pour order 9): 3890,9815 3890,9585 3905,9570 3920,9570 3925,9580 3930,9590 3930,9820 3960,9850 3855,9850
3V3 on Bottom Layer "Top" (solid, pour order 6): 3485,9545 3505,9525 3667.6,9525 3715,9477.6 3715,9375 3725,9365 3770,9365 3785,9380 3785,9470 3710,9545 3535,9545 3510,9570 3510,9670 3545,9705 3545,9830 3725.83,9830 3750.83,9855 3755,9855 3755,9900 3735,9920 3400,9920 3390,9910 3385,9910 3385,9695 3425,9655 3425,9560 3440,9545
3V3 on Bottom Layer "Top" (solid, pour order 3): 2180,9300 2245,9300 2245,9388.58 2247.6,9391.18 2163.78,9475 1905,9475 1870,9440 1870,9115 1910,9075 2030,9075 2065,9110 2065,9165 1947.4,9165 1940.79,9171.61 1940.79,9391.18 2133.82,9391.18 2155,9370 2155,9325
VCC on Bottom Layer "Top" (solid, pour order 4): 3385,9645 3400,9630 3400,9545 3440,9505 3495.35,9505 3519.53,9480.83 3519.53,9384.53 3505,9370 3395,9370 3365,9400 3365,9535 3340,9560 3340,9630 3355,9645
3V3 on Top Layer "Top" (solid, pour order 10): 2600,9720 2600,9670 2720,9670 3570,9670 3620,9720 3620,9920 3580,9960 2390,9960 2377.5,9957.5 2365,9945 2360,9940 2360,9775 2385,9750 2465,9750 2509.57,9705.43 2509.57,9312.6 2525,9297.16 2525,9295 2580,9295 2600,9315
3V3 on Top Layer "Top" (solid, pour order 18): 2272.5,8170 2272.5,8020 2297.5,7995 2387.5,7995 2417.5,8025 2417.5,8170
GND on Top Layer "Top" (solid, remove dead copper, pour order 2): 1589.21,6102.59 1535,6130 1485,6180 1451.85,6220.93 1430.68,6305 1427.63,6305.76 1077.68,9805.27 1103.31,9893.42 1205.26,10000 1258.58,10020.61 1300.22,10027.81 4787.19,10027.81 4917.57,9937.01 4969.11,9794.59 4621.54,6318.85 4612.32,6262.94 4569.44,6179.44 4523.28,6133.28 4449.04,6099.66 4427.72,6090 4382.7,6085.42 2020,6090 1644.95,6090.73
VCC on Top Layer "Top" (solid, pour order 13): 3340,9560 3630,9560 3640,9570 3640,9617.99 3652.01,9630 3845.47,9630 3845.47,9560 3845.47,9482.13 3518.23,9482.13 3518.23,9385.83 3519.53,9384.53 3505,9370 3395,9370 3365,9400 3365,9535
3V3 on 3V3 "Top" (solid, remove dead copper, pour order 17): 1584.21,6097.59 1530,6125 1480,6175 1446.85,6215.93 1425.68,6300 1422.63,6300.76 1072.68,9800.27 1098.31,9888.42 1200.26,9995 1253.58,10015.61 1295.22,10022.81 4782.19,10022.81 4912.57,9932.01 4964.11,9789.59 4616.54,6313.85 4607.32,6257.94 4564.44,6174.44 4518.28,6128.28 4444.04,6094.66 4422.72,6085 4377.7,6080.42 2015,6085 1639.95,6085.73
GND on GND "Top" (solid, remove dead copper, pour order 19): 1580.09,6098 1525.89,6125.41 1475.89,6175.41 1442.73,6216.34 1421.57,6300.41 1418.52,6301.17 1068.57,9800.68 1094.19,9888.83 1196.14,9995.41 1249.47,10016.02 1291.11,10023.22 4778.08,10023.22 4908.45,9932.42 4960,9790 4612.43,6314.26 4603.21,6258.35 4560.33,6174.85 4514.16,6128.69 4439.93,6095.07 4418.6,6085.41 4373.58,6080.83 2010.89,6085.41 1635.84,6086.14